# Altium PCB PCB_Rev1.PcbDoc
Units mm, origin at the board's own origin, x right, y up, seen from the top; angles counter-clockwise.
Board outline 37.4 x 31.8 mm, 4 copper layers (Top Layer, Layer 1 (GND), Layer 2 (PWR), Bottom Layer), stack 1.554 mm thick; 62 components, 43 nets, 242 pads, 70 vias.
Unrouted connection lines stored in the file: 48.
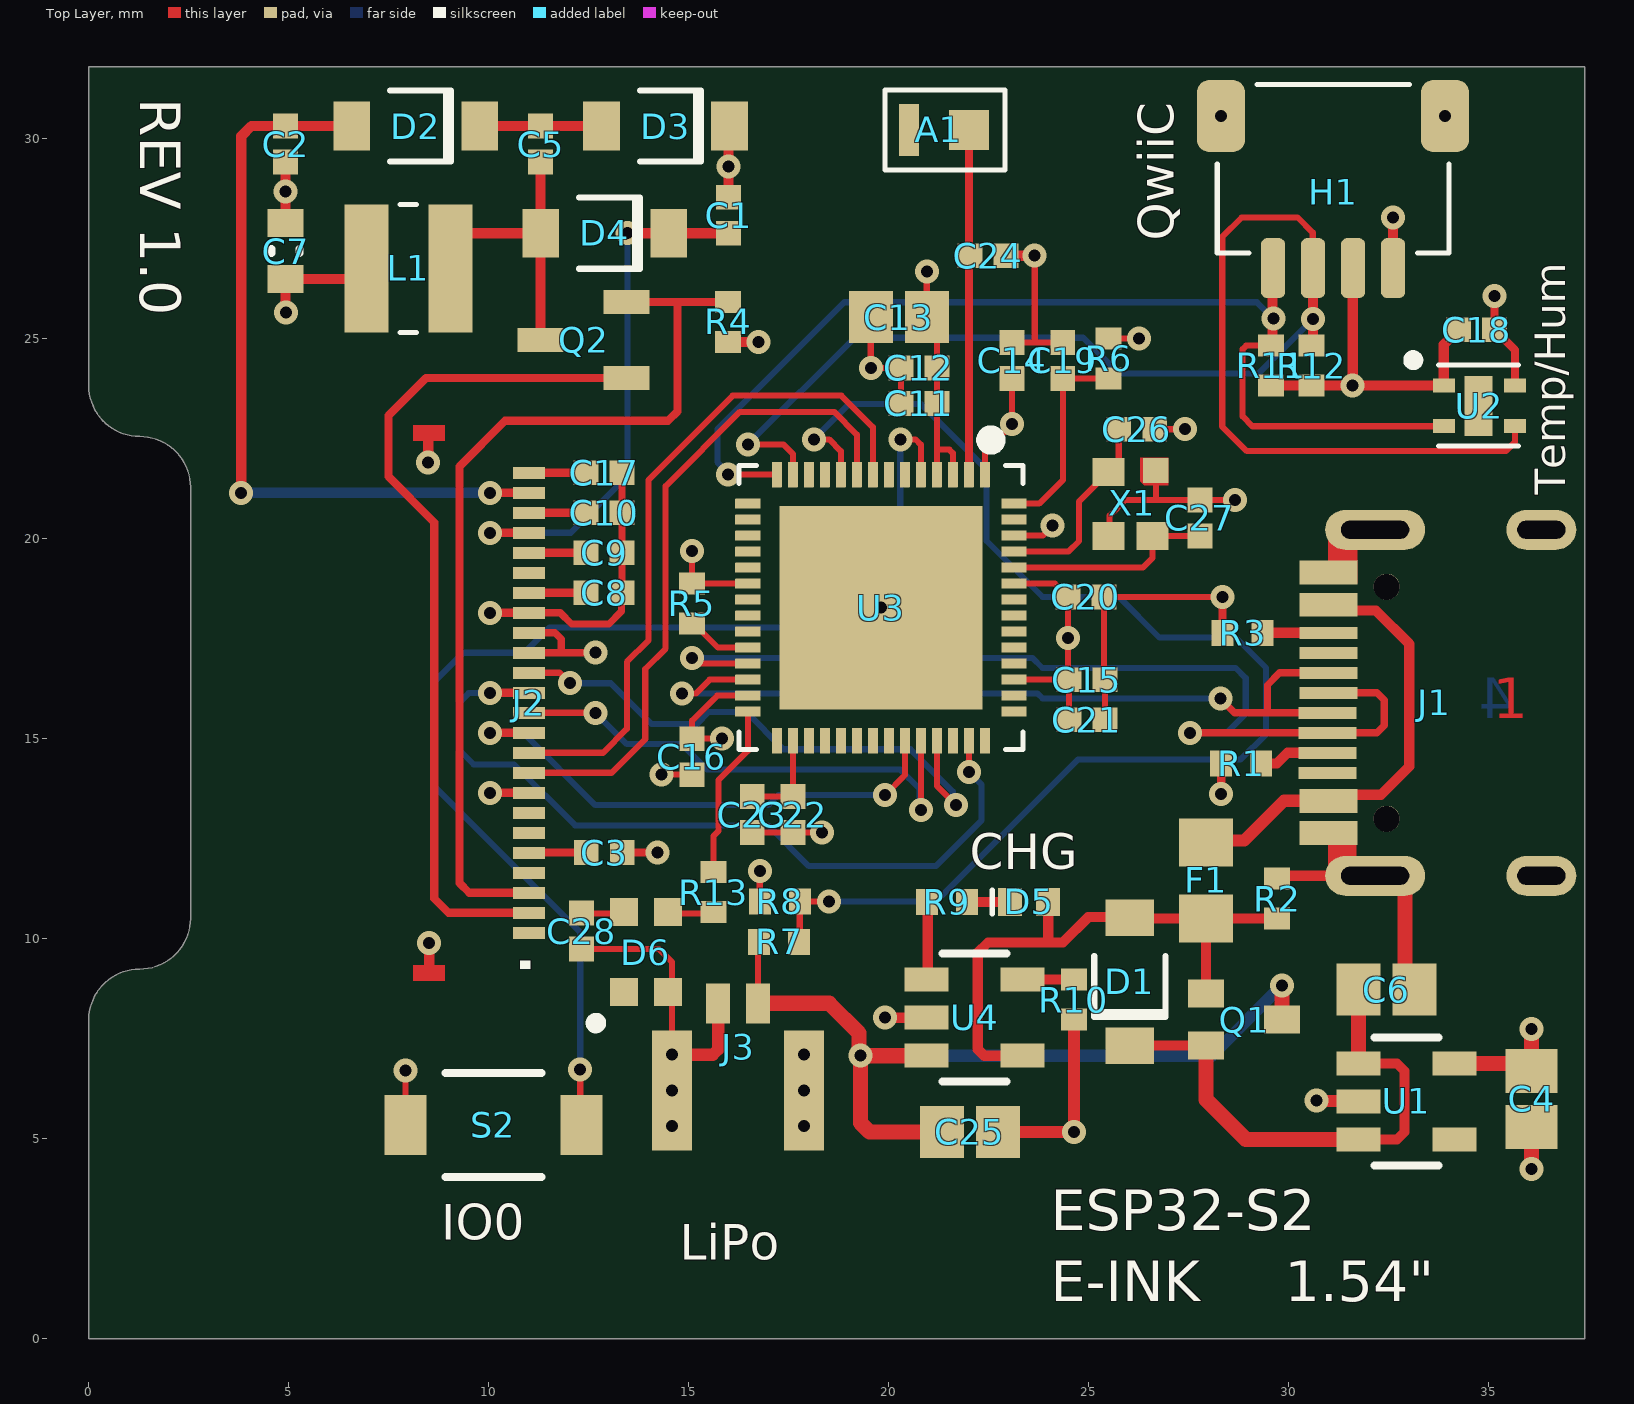
[diagram p0: Top Layer view]
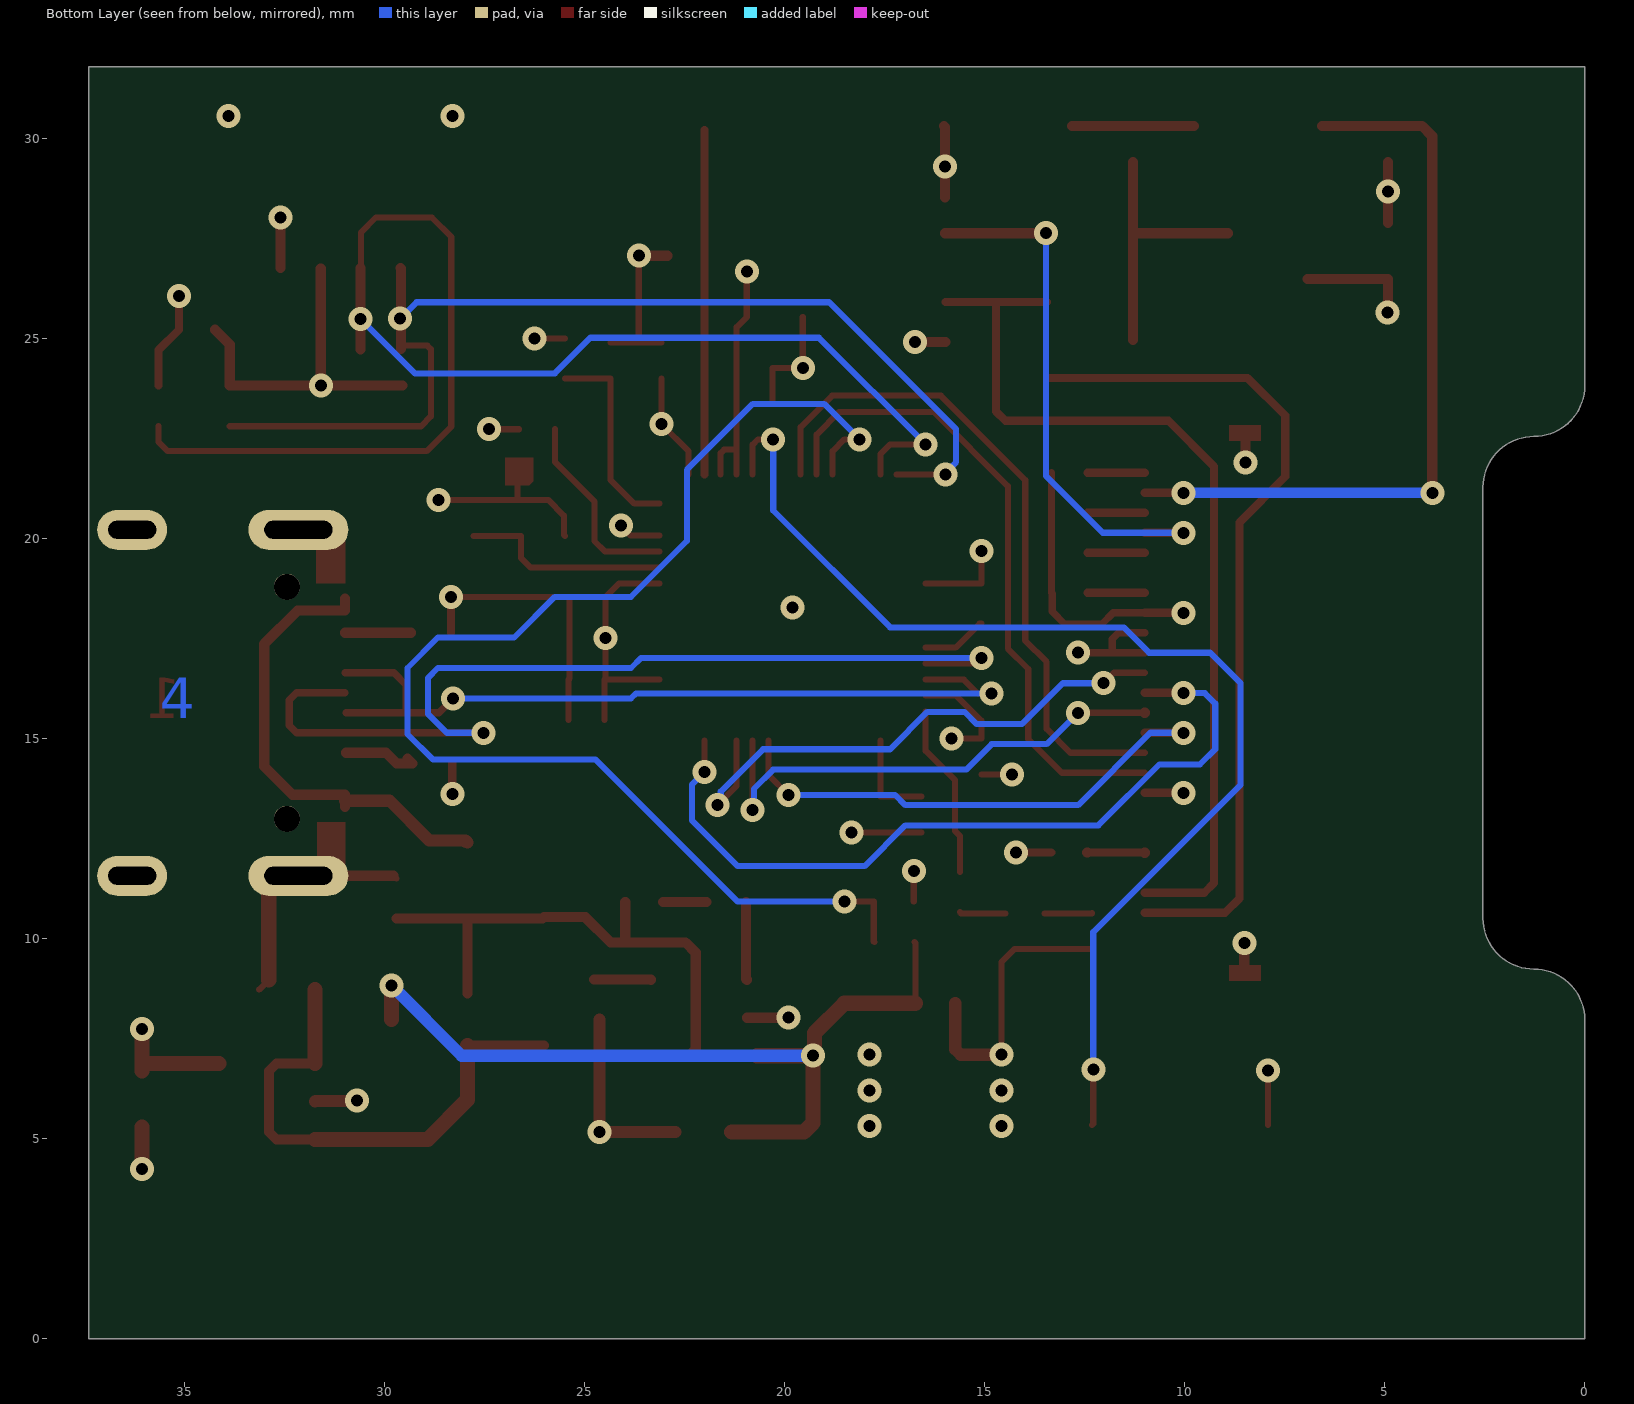
[diagram p1: Bottom Layer view, seen from below]
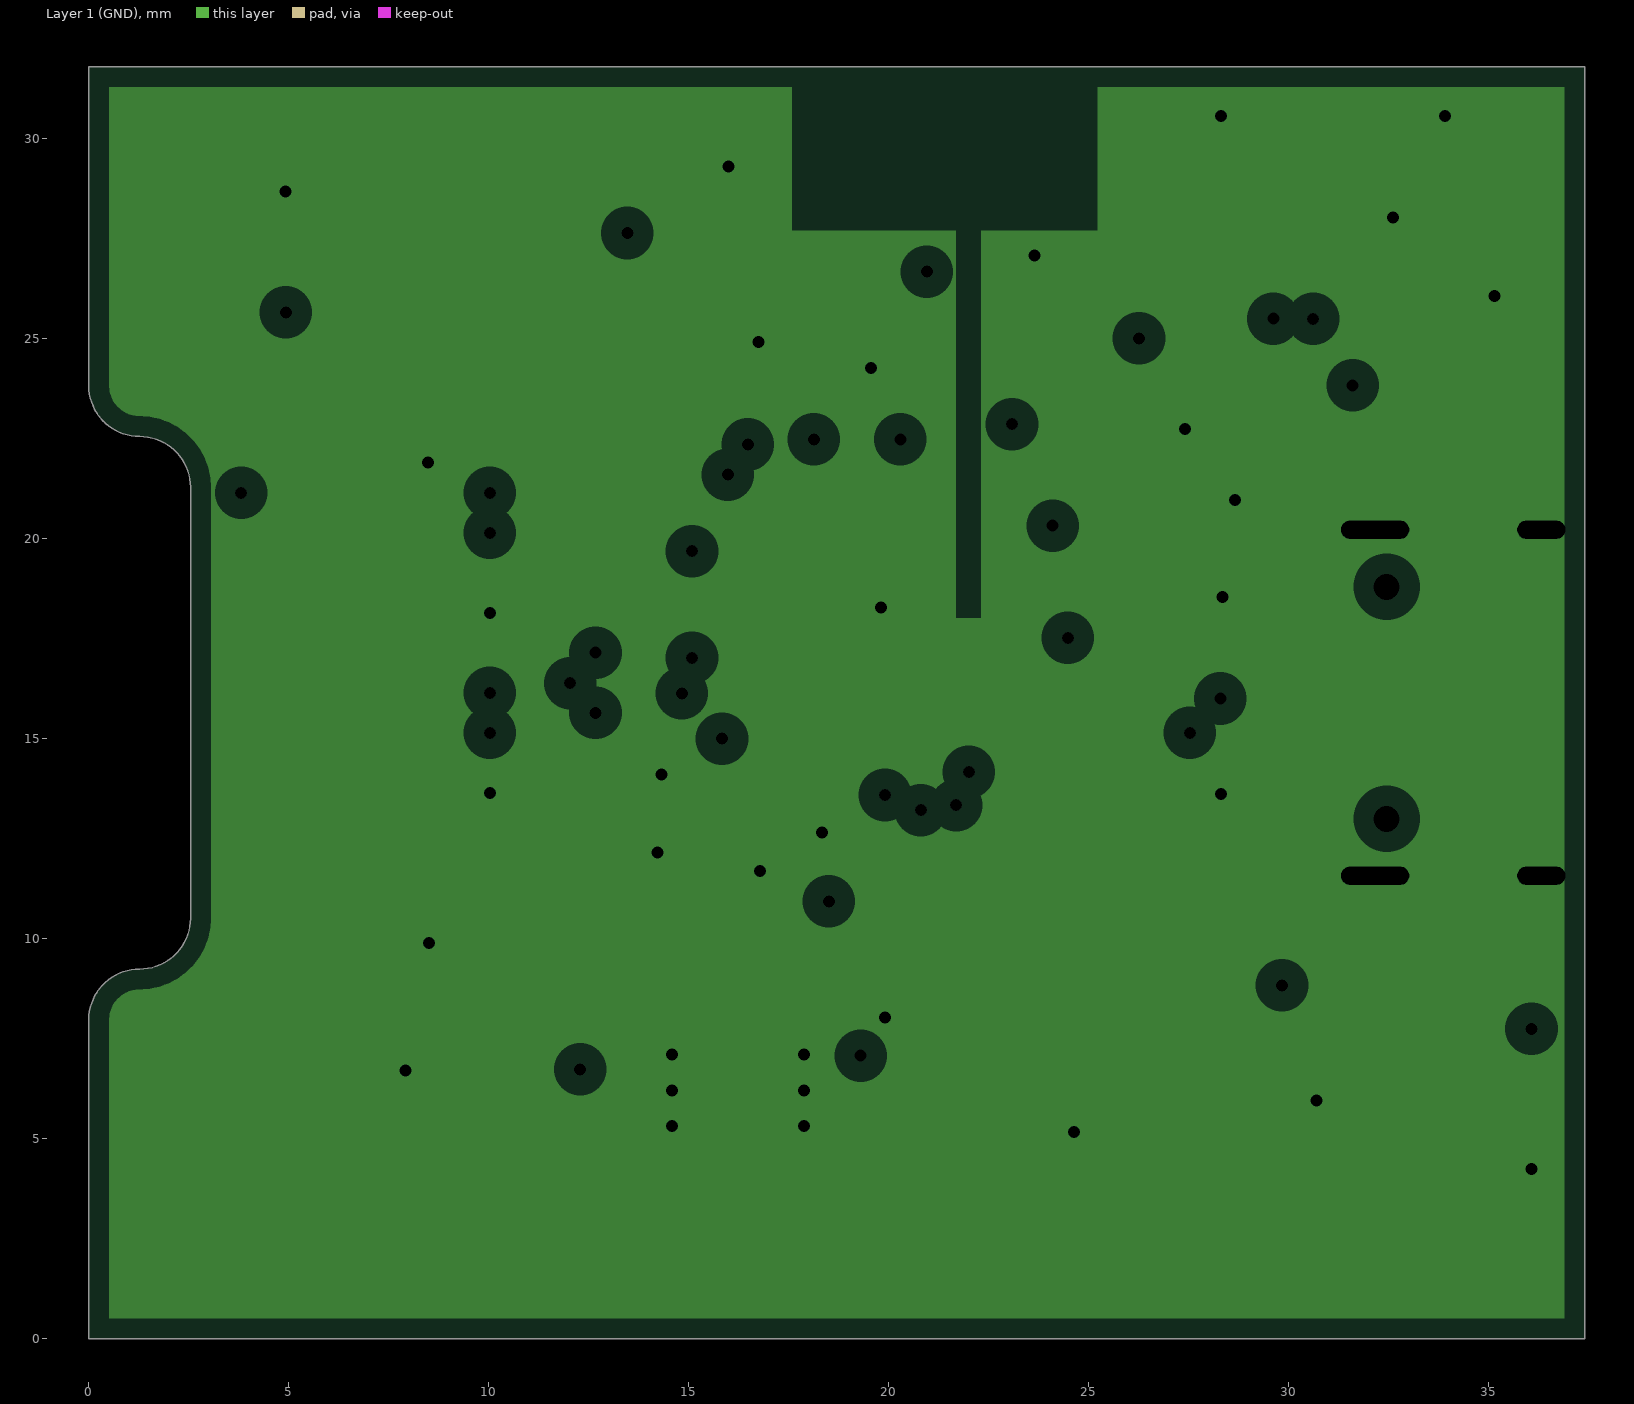
[diagram p2: Layer 1 (GND), clearances drawn from the general rule]
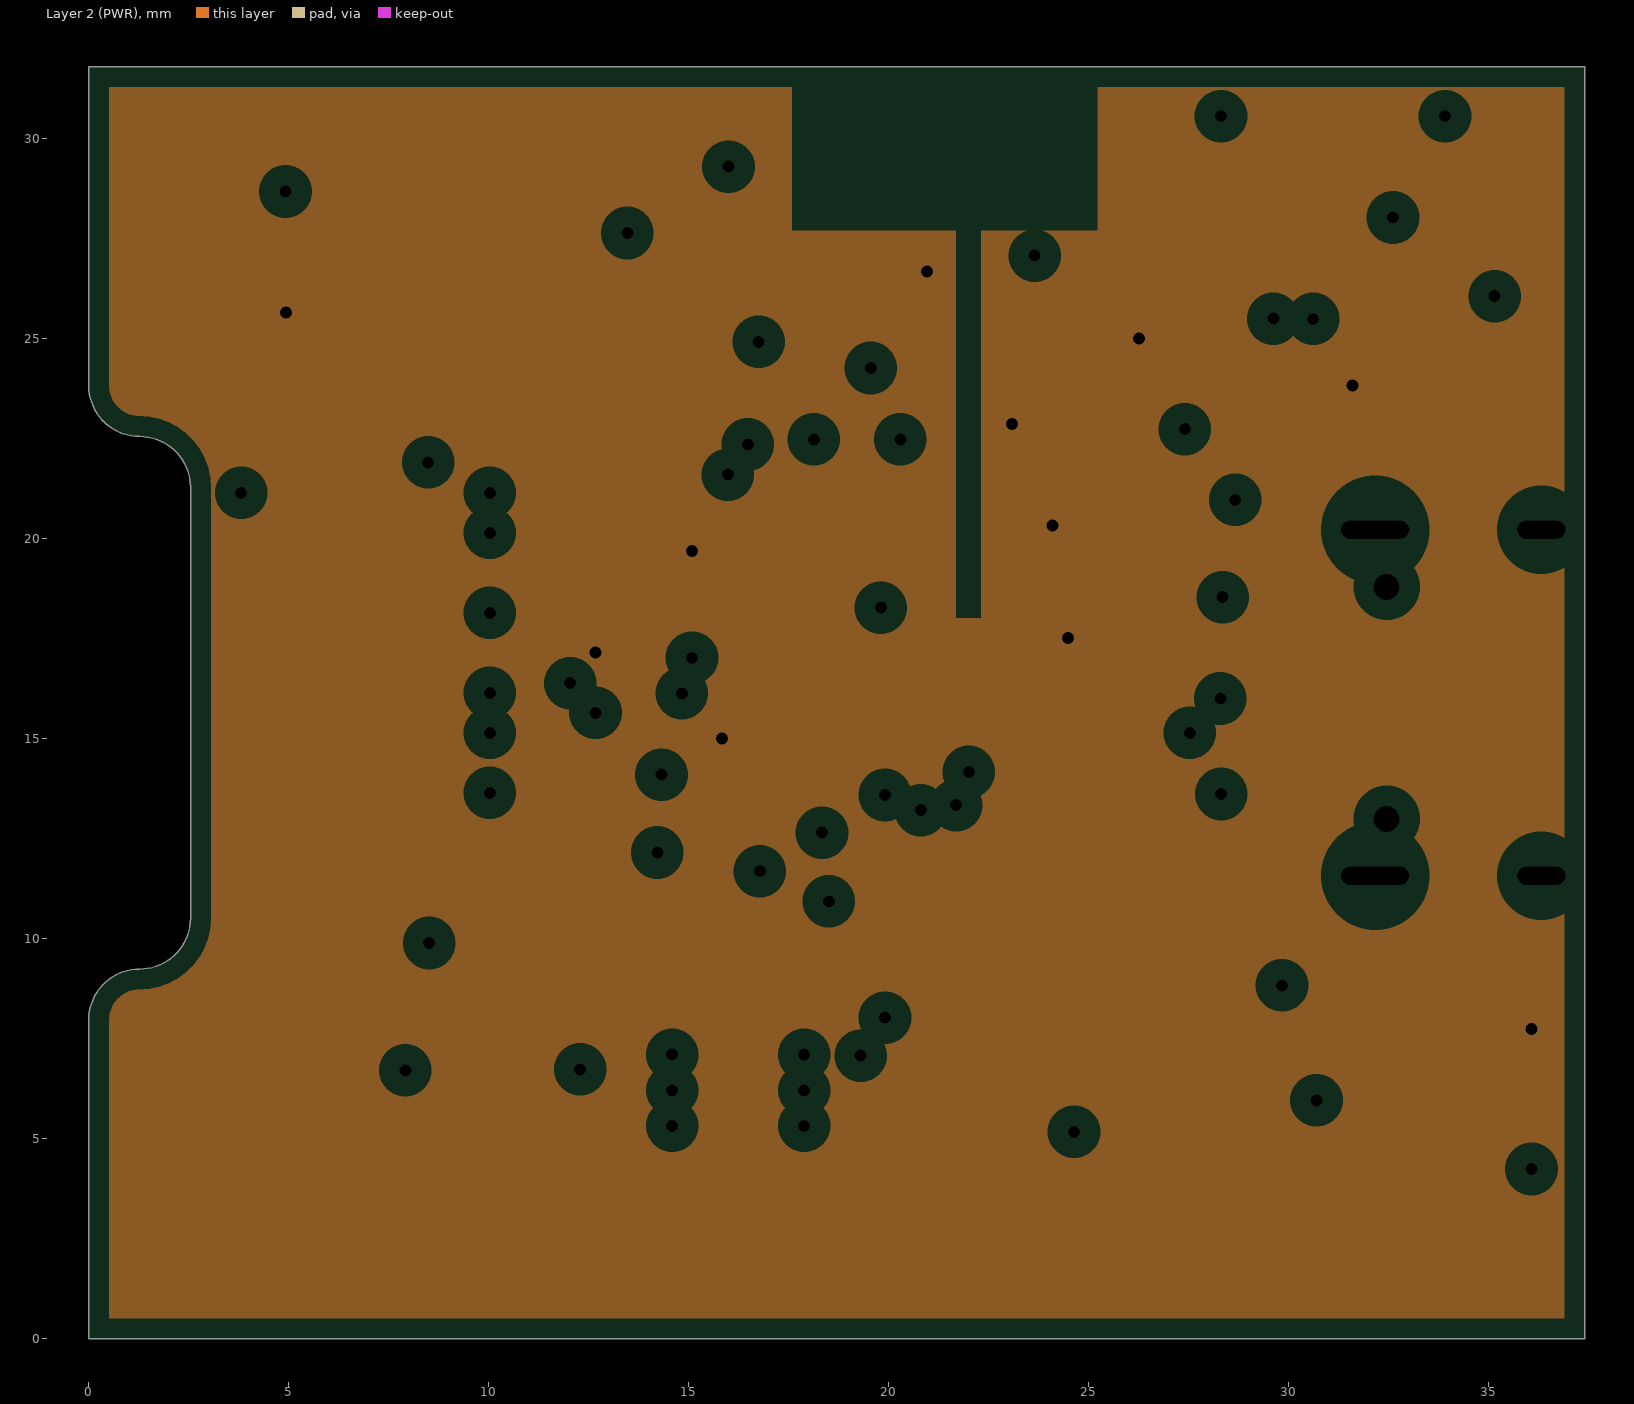
[diagram p3: Layer 2 (PWR), clearances drawn from the general rule]
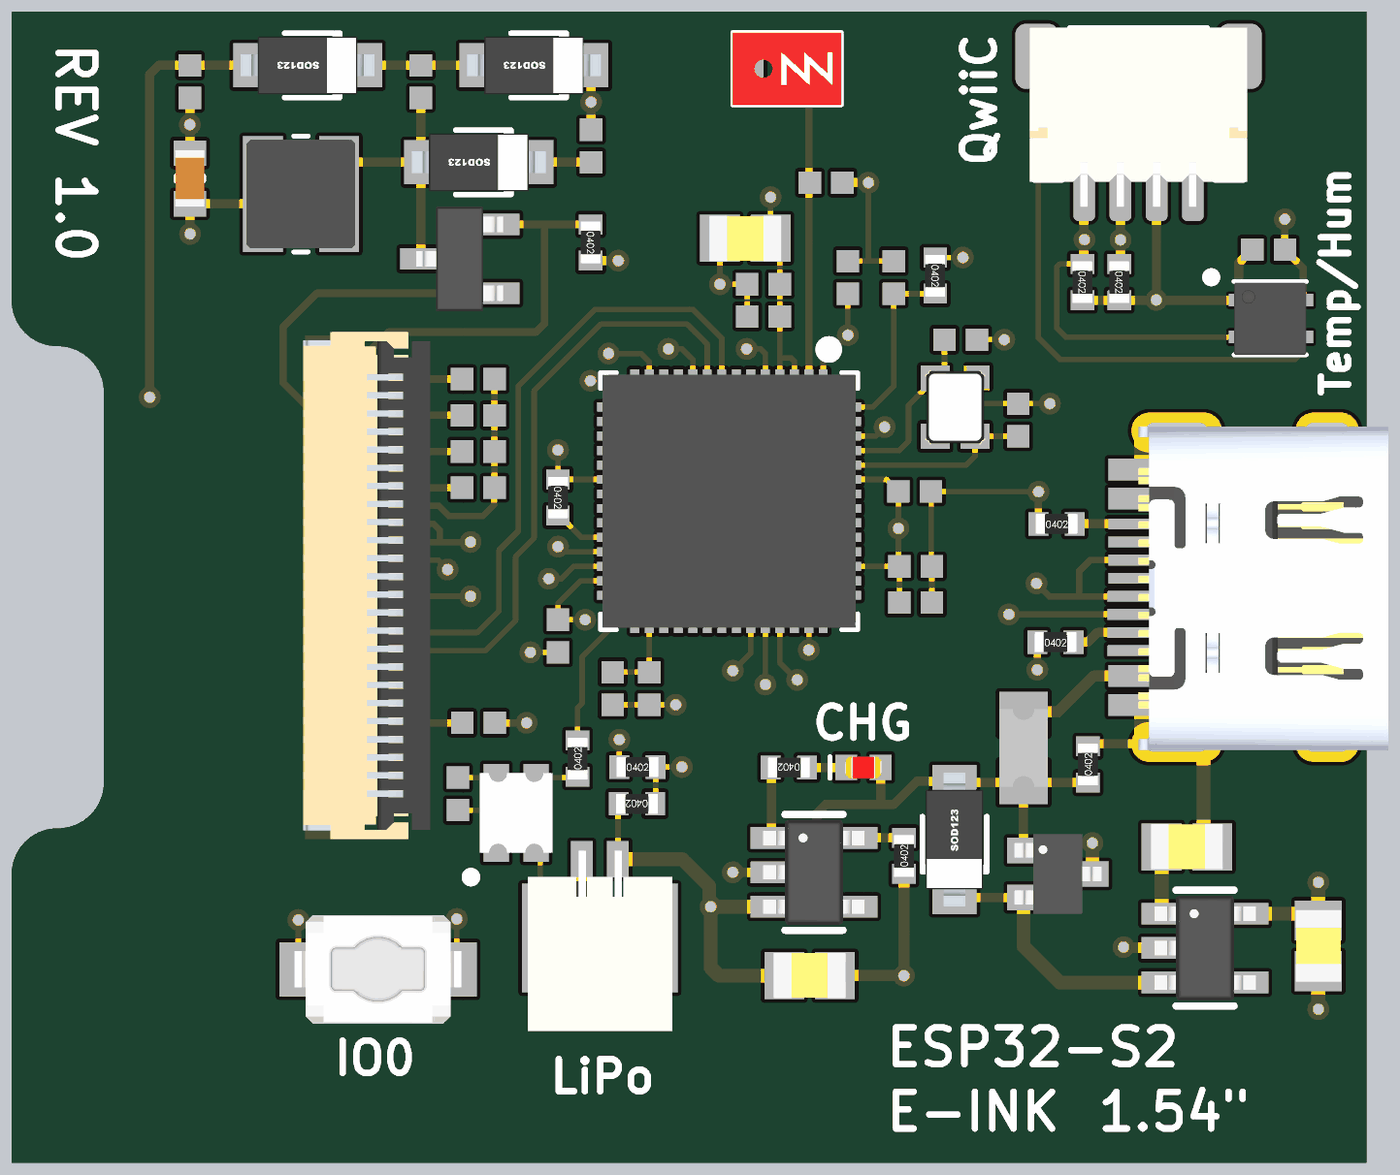
[diagram p4: 3D render of the assembled board from above, using the file's embedded part models]

## Layer stack, top to bottom
Top Solder: solder mask 0.0102, Solder Resist, Dk 3.5
Top Layer: signal copper 0.0356
Dielectric 2: prepreg 0.0711, PP-006, Dk 4.1
Layer 1 (GND): plane copper 0.0305, net GND
Dielectric 1: dielectric 1.2802, FR-4, Dk 4.8
Layer 2 (PWR): plane copper 0.0305, net +3.3V
Dielectric 3: prepreg 0.0711, PP-006, Dk 4.1
Bottom Layer: signal copper 0.0356
Bottom Solder: solder mask 0.0102, Solder Resist, Dk 3.5

## Board outline
0,0 0,7.975 cw(c1.27,7.973) 1.273,9.243 ccw(c1.275,10.513) 2.545,10.511 2.545,21.289 ccw(c1.275,21.287) 1.273,22.557 cw(c1.27,23.827) 0,23.825 0,31.8 37.4,31.8 37.4,0

## Design rules (kind name [scope] priority, off if disabled: settings)
Clearance Clearance_U2 [All vs InComponent('U2')] p1: gap=0.152 ignorepadtopadclearanceinfootprint=FALSE
Clearance Clearance_U3 [All vs InComponent('U3')] p2: gap=0.14 ignorepadtopadclearanceinfootprint=FALSE
Clearance Clearance_J1 [All vs InComponent('J1')] p3: gap=0.127 ignorepadtopadclearanceinfootprint=FALSE
Clearance Clearance_J2 [All vs InComponent('J2')] p4: gap=0.127 ignorepadtopadclearanceinfootprint=FALSE
Clearance [All] p5: gap=0.246 ignorepadtopadclearanceinfootprint=FALSE
MinimumSolderMaskSliver [All] p1: minsoldermaskwidth=0.046
PlaneClearance [All] p1: clearance=0.508
PlaneConnect PlaneConnect_Via [(IsVia)] p1: planeconnectstyle=Direct reliefexpansion=0.508 reliefentries=4 reliefconductorwidth=0.254 reliefairgap=0.254
PlaneConnect [All] p2: planeconnectstyle=Relief reliefexpansion=0.508 reliefentries=4 reliefconductorwidth=0.254 reliefairgap=0.254
PolygonConnect [All] p1: connectstyle=Relief reliefconductorwidth=0.254 reliefentries=4 polygonreliefangle="90 Angle" airgapwidth=0.254
RoutingVias [All] p1: holewidth=0.711 width=1.27 viastyle="Through Hole" minholewidth=0.711 minwidth=1.27 maxholewidth=0.711 maxwidth=1.27
SilkToSilkClearance [All] p1: silktosilkclearance=0.051
SilkToSolderMaskClearance [IsPad] p1: minsilkscreentomaskgap=0.051 clearancetoexposedcopper=TRUE
SolderMaskExpansion [All] p1: expansion=0.102 istentingtop=FALSE
Width [All] p1: maxlimit=0.635 minlimit=0.152 preferedwidth=0.152
25 further rules are at their usual default settings.

## Components (designator, comment, footprint, x,y, rotation, side; value= is the part's Value field where it differs from the comment)
A1 "NN02-101" NN02-101 21.255,30.223 r180 top value="Chip Antenna"
C1 "1uF" CAPC1005X56N 15.994,28.089 r90 top
C2 "1uF" CAPC1005X56N 4.92,29.867 r90 top
C3 "1uF" CAPC1005X56N 12.888,12.156 r180 top
C4 "10uF" CAPC2012X140N 36.07,5.995 r270 top
C5 "1uF" CAPC1005X56N 11.295,29.867 r270 top
C6 "10uF" CAPC2012X140N 32.442,8.727 r0 top
C7 "2.2uF" CAPC1608X09L 4.92,27.193 r90 top
C8 "1uF" CAPC1005X56N 12.882,18.65 r180 top
C9 "1uF" CAPC1005X56N 12.882,19.65 r180 top
C10 "1uF" CAPC1005X56N 12.882,20.65 r180 top
C11 "0.1uF" CAPC1005X56N 20.754,23.382 r180 top
C12 "1uF" CAPC1005X56N 20.754,24.271 r180 top
C13 "10uF" CAPC2012X140N 20.25,25.541 r180 top
C14 "0.1uF" CAPC1005X56N 23.082,24.458 r90 top
C15 "0.1uF" CAPC1005X56N 24.953,16.477 r0 top
C16 "0.1uF" CAPC1005X56N 15.081,14.552 r270 top
C17 "1uF" CAPC1005X56N 12.882,21.65 r180 top
C18 "0.1uF" CAPC1005X56N 34.696,25.226 r0 top
C19 "0.1uF" CAPC1005X56N 24.352,24.458 r90 top
C20 "0.1uF" CAPC1005X56N 24.929,18.547 r0 top
C21 "1uF" CAPC1005X56N 24.954,15.474 r0 top
C22 "0.1uF" CAPC1005X56N 17.604,13.104 r270 top
C23 "1uF" CAPC1005X56N 16.588,13.104 r270 top
C24 "1pF" CAPC1005X56N 22.483,27.076 r0 top
C25 "10uF" CAPC2012X140N 22.028,5.171 r0 top
C26 "10pF" CAPC1005X56N 26.199,22.738 r0 top
C27 "10pF" CAPC1005X56N 27.781,20.521 r90 top
C28 "0.1uF" CAPC1005X56N 12.319,10.193 r270 top
D1 "MBR0520" SOD123 26.027,8.93 r90 top
D2 "MBR0520-TP" SOD123 8.171,30.317 r180 top value=MBR0520
D3 "MBR0520-TP" SOD123 14.419,30.317 r180 top value=MBR0520
D4 "MBR0520-TP" SOD123 12.895,27.639 r180 top value=MBR0520
D5 "Red Led" LED1005X40N-Red 23.512,10.922 r0 top
D6 "RGB" WS2812B-2020 13.928,9.668 r270 top value=NeoPixel
F1 "TLC-PSMD050" PTC2012X70L 27.932,11.46 r90 top
H1 "QWiiC" SM04B-SRSS-TB 31.107,28.666 r180 top locked
J1 "USB-C" TYPE-C-31-M-12 36.114,20.225 r90 top locked
J2 "24POS Flex Connector" 687124182122 11,15.9 r90 top
J3 "CON2" JST_Micro_2PIN 16.236,8.387 r0 top
L1 "68uH" "INDUCTOR, 3mmX3mm" 7.988,26.761 r180 top
Q1 "LP1480WT1G" SC-70 28.882,7.98 r0 top
Q2 "" SOT95P240X110-3N 12.37,24.972 r180 top
R1 "5.1K" "RESC1005X40L (0402 FOOTPRINT)" 28.812,14.381 r0 top
R2 "100K" "RESC1005X40L (0402 FOOTPRINT)" 29.71,11.005 r90 top
R3 "5.1K" "RESC1005X40L (0402 FOOTPRINT)" 28.846,17.65 r0 top
R4 "2.2R" "RESC1005X40L (0402 FOOTPRINT)" 15.985,25.422 r270 top
R5 "10K" "RESC1005X40L (0402 FOOTPRINT)" 15.081,18.377 r270 top
R6 "10K" "RESC1005X40L (0402 FOOTPRINT)" 25.495,24.508 r270 top
R7 "100K" "RESC1005X40L (0402 FOOTPRINT)" 17.259,9.92 r180 top
R8 "100K" "RESC1005X40L (0402 FOOTPRINT)" 17.275,10.936 r0 top
R9 "4.7K" "RESC1005X40L (0402 FOOTPRINT)" 21.455,10.922 r180 top
R10 "4K" "RESC1005X40L (0402 FOOTPRINT)" 24.63,8.481 r90 top
R11 "10K" "RESC1005X40L (0402 FOOTPRINT)" 29.558,24.329 r270 top
R12 "10K" "RESC1005X40L (0402 FOOTPRINT)" 30.574,24.329 r270 top
R13 "100R" "RESC1005X40L (0402 FOOTPRINT)" 15.621,11.168 r90 top
S2 "=Value" TS-1088R-02526 10.114,5.348 r180 top
U1 "HT7833" SOT95P280X144-5N 32.942,5.933 r0 top
U2 "SHTC3" "DFN-4 (2.0mm X 2.0mm)" 34.765,23.321 r0 top value=Temp/Humid
U3 "ESP32-S2" "QFN56_0.4mm pitch" 19.804,18.277 r270 top locked
U4 "MCP73831T-2ACI/OT" SOT95P280X144-5N 22.147,8.026 r0 top value=MCP73831T-2ACI
X1 "40 Mhz" OSC20X16 26.086,20.889 r270 top

## Footprints (in the part's own frame and the unit in brackets; to place one, negate y for a bottom-side part, rotate by r counter-clockwise, add the part's x,y. Pads: shape width x height; smd on the part's side, far side on the other; paste and mask are expansions set on the pad)
687124182122 [mm] "CONN FFC TOP/BOT 24POS 0.50MM R/A"
  rect 0.3x0.8 smd: 1(-5.75,0) 2(-5.25,0) 3(-4.75,0) 4(-4.25,0) 5(-3.75,0) 6(-3.25,0) 7(-2.75,0) 8(-2.25,0) 9(-1.75,0) 10(-1.25,0) 11(-0.75,0) 12(-0.25,0) 13(0.25,0) 14(0.75,0) 15(1.25,0) 16(1.75,0) 17(2.25,0) 18(2.75,0) 19(3.25,0) 20(3.75,0) 21(4.25,0) 22(4.75,0) 23(5.25,0) 24(5.75,0)
  Top Layer region: 6.55,2.1 6.95,2.1 6.95,2.9 6.55,2.9
  Top Layer region: -6.95,2.1 -6.55,2.1 -6.55,2.9 -6.95,2.9
  body extent -6.95,-0.55 7.05,2.95, height 0.96
CAPC1005X56N [mm] "Chip Capacitor, 2-Leads, Body 1.0x0.5mm, IPC Medium Density (0402 ceramic)"
  rect 0.62x0.62 smd: 1(-0.45,0) 2(0.45,0)
  body extent -0.55,-0.3 0.55,0.3, height 0.6
CAPC1608X09L [mm] "Chip Capacitor, 2-Leads, Body 1.6x0.8mm, IPC High Density (0603 dense)"
  rect 0.7x0.9 smd: 1(-0.7,0) 2(0.7,0)
  silkscreen extent -0.05,-0.35 0.05,0.35, body extent -0.89,-0.48 0.88,0.48, height 1.03
CAPC2012X140N [mm] "Chip Capacitor, 2-Leads, Body 2.0x1.3mm, IPC Medium Density (0805 ceramic)"
  rect 1.1x1.3 smd: 1(-0.7,0) 2(0.7,0)
  body extent -1,-0.62 1,0.63, height 1.24
"DFN-4 (2.0mm X 2.0mm)" [mm] "DFN-4 (2.0mm X 2.0mm)"
  rect 0.55x0.35 smd mask+0.076: 1(-0.889,0.508) 2(-0.889,-0.508) 3(0.889,-0.508) 4(0.889,0.508)
  rect 0.7x1.5 smd paste-0.1 mask+0.076: 7(-0.025,0)
  silkscreen extent -1.78,-1 0.97,1.27, body extent -1.02,-1 0.98,1, height 0.75
"INDUCTOR, 3mmX3mm" [mm] "Inductor, 2-Leads, (3mmX3mm)"
  rect 1.1x3.2 smd: 1(-1.05,0) 2(1.05,0)
  silkscreen extent -0.2,-1.6 0.2,1.6, body extent -1.5,-1.5 1.5,1.5, height 1.5
JST_Micro_2PIN [mm]
  rect 0.6x1 smd: 1(0.5,0) 2(-0.5,0)
  rect 1x3 smd: ""(-1.65,-2.175) ""(1.65,-2.175)
  body extent -1.99,-4.74 2,0.24, height 2.9
LED1005X40N-Red [mm] "Chip LED 2-Leads, Body 1.0x0.5mm, (0402)"
  rect 0.6x0.7 smd: 1(-0.475,0) 2(0.475,0)
  silkscreen extent -0.92,-0.3 -0.92,0.3, body extent -0.5,-0.3 0.5,0.3, height 0.2
NN02-101 [mm] "COMPACT REACH XTEND - 101"
  rect 1x1 smd: 1(-0.75,0)
  rect 0.5x1.3 smd: 2(0.75,0)
  silkscreen extent -1.65,-1 1.35,1, body extent -1.65,-1 1.35,1, height 0.8
OSC20X16 [mm] "Crystal 2.0mm x 1.60mm 0.5mm height"
  rect 0.7x0.8 smd: 1(-0.783,-0.591) 2(0.817,-0.591) 3(0.817,0.509)
  rect 0.635x0.635 smd: 4(-0.817,0.591)
  Top Layer region: -1.138,0.196 -0.554,0.196 -0.453,0.298 -0.453,0.907 -1.138,0.907
  body extent -1.01,-0.87 1.04,0.78, height 0.4
PTC2012X70L [mm] "Chip Fuse, 2-Leads, Body 2.0x1.3mm, IPC Medium Density (0805)"
  rect 1.2x1.35 smd: 1(-0.95,0) 2(0.95,0)
  body extent -1.07,-0.67 1.08,0.68, height 0.66
"QFN56_0.4mm pitch" [mm] "QFN, 56-Leads, Body 7x7mm, Pitch 0.4mm, IPC Medium Density"
  rrect9% 0.635x0.25 smd: 1(-3.326,2.6) 2(-3.326,2.2) 3(-3.326,1.8) 4(-3.326,1.4) 5(-3.326,1) 6(-3.326,0.6) 7(-3.326,0.2) 8(-3.326,-0.2) 9(-3.326,-0.6) 10(-3.326,-1) 11(-3.326,-1.4) 12(-3.326,-1.8) 13(-3.326,-2.2) 14(-3.326,-2.6) 29(3.326,-2.6) 30(3.326,-2.2) 31(3.326,-1.8) 32(3.326,-1.4) 33(3.326,-1) 34(3.326,-0.6) 35(3.326,-0.2) 36(3.326,0.2) 37(3.326,0.6) 38(3.326,1) 39(3.326,1.4) 40(3.326,1.8) 41(3.326,2.2) 42(3.326,2.6)
  rrect9% 0.25x0.635 smd: 15(-2.6,-3.326) 16(-2.2,-3.326) 17(-1.8,-3.326) 18(-1.4,-3.326) 19(-1,-3.326) 20(-0.6,-3.326) 21(-0.2,-3.326) 22(0.2,-3.326) 23(0.6,-3.326) 24(1,-3.326) 25(1.4,-3.326) 26(1.8,-3.326) 27(2.2,-3.326) 28(2.6,-3.326) 43(2.6,3.326) 44(2.2,3.326) 45(1.8,3.326) 46(1.4,3.326) 47(1,3.326) 48(0.6,3.326) 49(0.2,3.326) 50(-0.2,3.326) 51(-0.6,3.326) 52(-1,3.326) 53(-1.4,3.326) 54(-1.8,3.326) 55(-2.2,3.326) 56(-2.6,3.326)
  rect 5.08x5.08 smd paste-4: 57(0,0)
  silkscreen extent -4.37,-3.55 3.55,3.55, body extent -3.5,-3.5 3.5,3.5, height 0.8
"RESC1005X40L (0402 FOOTPRINT)" [mm] "Chip Resistor, 2-Leads, Body 1.0x0.5mm, IPC Medium Density (0402)"
  rect 0.55x0.65 smd: 1(-0.5,0) 2(0.5,0)
  body extent -0.57,-0.27 0.58,0.28, height 0.41
SC-70 [mm] "SOT23, 3-Leads, Body 2x1.25mm, Pitch 0.65mm"
  rect 0.9x0.7 smd: 1(-0.95,0.65) 2(-0.95,-0.65) 3(0.95,0)
  body extent -1.2,-1.1 1.2,1.1, height 1
SM04B-SRSS-TB [mm] "CONN HEADER 4POS .100 R/A QWIIC"
  rrect50% 0.6x1.5 smd: 1(1.5,1.9) 2(0.5,1.9) 3(-0.5,1.9) 4(-1.5,1.9)
  rrect50% 1.2x1.8 smd: 5(-2.8,-1.9) 5(2.8,-1.9)
  silkscreen extent -2.9,-2.69 2.9,1.52, body extent -3,-2.69 3,2.26, height 3.25
SOD123 [mil] "Molded Diode, 2-Leads, Body 2.85x1.8mm, IPC Medium Density (SOD123)"
  rect 36x48 smd: 1(-63,0) 2(63,0)
  silkscreen extent -35,-35 25,35, body extent -73,-31 73,31, height 50
SOT95P240X110-3N [mm] "SOT23, 3-Leads, Body 3.0x2.5mm (max), Pitch 0.95mm, IPC Medium Density"
  rect 1.15x0.6 smd: 1(-1.075,0.95) 2(-1.075,-0.95) 3(1.075,0)
  body extent -1.2,-1.45 1.2,1.45, height 0.99
SOT95P280X144-5N [mm] "SOT23, 5-Leads, Body 3.1x3.0mm (max), Pitch 0.95mm, IPC Medium Density (RFMD SOT23-5)"
  rect 1.1x0.6 smd: 1(-1.2,0.95) 2(-1.2,0) 3(-1.2,-0.95) 4(1.2,-0.95) 5(1.2,0.95)
  silkscreen extent -0.8,-1.6 0.8,1.6, body extent -1.4,-1.45 1.4,1.45, height 1.45
TS-1088R-02526 [mm] "SWITCH TACTILE SPST-NO 0.05A 12V"
  rect 1.05x1.5 smd: 1(-2.2,0) 2(2.2,0)
  silkscreen extent -1.2,-1.3 1.2,1.3, body extent -2.3,-1.5 2.3,1.5, height 2
TYPE-C-31-M-12 [mm] "USB-C Connector"
  oval 1x1.75 hole 0.45 slot 1.2 at 90 deg: 1(-8.65,-0.2) 1(0,-0.2)
  oval 1x2.5 hole 0.45 slot 1.7 at 90 deg: 1(-8.65,3.955) 1(0,3.955)
  rect 0.3x1.45 smd: A1(-7.726,5.119) A4(-6.926,5.117) A5(-5.575,5.142) A6(-4.575,5.142) A7(-4.075,5.117) A8(-3.075,5.117) A9(-1.727,5.117) A12(-0.924,5.117) B1(-1.224,5.117) B4(-2.021,5.117) B5(-2.575,5.117) B6(-3.575,5.117) B7(-5.075,5.142) B8(-6.075,5.142) B9(-6.626,5.117) B12(-7.426,5.119)
  round 0.65 hole 0.65 unplated: ""(-7.225,3.667) ""(-1.425,3.667)
  body extent -8.82,-1.89 0.12,5.01, height 3.31
WS2812B-2020 [mm] "NeoPixel 2.0mm x 2.0mm"
  rect 0.7x0.7 smd: 1(1,-0.55) 2(1,0.55) 3(-1,0.55) 4(-1,-0.55)
  silkscreen extent 1.65,-1.38 1.9,-1.12, body extent -1.1,-1 1.1,1, height 0.84

## Part data
A1: "Antenna Chip 2.4Gig", Manufacturer=Ignion, Part_Number=NN02-101, Vendor=Digi-Key
C1 C2 C3 C5 C8 C9 C10 C12 C17 C21: library part CAP_0402, "CAP 1uF 0402", Part_Footprint=0402
  C12 C21: Vendor=LCSC
C4 C6 C13 C25: library part CAP_0805, "CAP 10uF 0805"
  C4 C6 C25: Part_Footprint=0805
C7: library part CAP_0402, "CAP 2.2uF 0603", Part_Footprint=0603
C11 C14 C15 C16 C18 C20 C22 C23 C28: library part CAP_0402, "CAP 0.1uF 0402", Part_Footprint=0402
  C11 C14 C15 C16 C20 C22 C23 C28: Vendor=LCSC
C19: library part CAP_0402, "CAP 0.1uF 0402", LCSC_Part_Number=C344190, Manufacturer=CCTC, Man_Part_Number=TCC0402X5R104M160AT, Vendor=LCSC
C24: library part CAP_0402, "CAP 1pF 0402", Part_Footprint=0402
C26 C27: library part CAP_0402, "CAP 10pF 0402", Part_Footprint=0402, Vendor=LCSC
D1: library part MBR0520-TP, "DIODE SCHOTTKY 20V 500MA SOD-123", Manufacturer=Micro, Part_Footprint=SOD-123, Part_Number=C78746, Vendor=LCSC
D2 D3 D4: "DIODE SCHOTTKY 20V 500MA SOD-123", Manufacturer=Micro, Part_Footprint=SOD-123, Part_Number=C78746, Vendor=LCSC
D5: library part LED_0402_SMALL_Red, "LED Red 0402", Manufacturer=Lite-On, Part_Footprint=0402, Part_Number=C364556, Vendor=LCSC
D6: library part WS2812B-2020, "LED,RGB,NEOPIXEL,WS2818B 2020", Manufacturer=Worldsemi, Part_Footprint=SMD-5050, Part_Number=C139127, Vendor=LCSC
F1: library part PTC_FUSE, "PTC FUSE 500mA hold, 1A trip", Manufacturer=TLC, Part_Number=C261942, Vendor=LCSC
H1: library part SM04B-SRSS-TB, "CONN HEADER 4POS .100 R/A QWIIC", Manufacturer=JST, Part_Number=PRT-14417, Vendor=Digi-Key
J1: "CONN RECPT USB-C", Manufacturer=KHE, Part_Footprint=SMT, Part_Number=C165948, Vendor=LCSC
J2: library part 687124182122, "CONN FFC TOP/BOT 24POS 0.50MM R/A", Manufacturer=Wurth, Part_Number=687124182122, Vendor=Digi-Key
J3: library part JST_Micro_CONN_2PIN, "JST MIcro CONN 2POS"
L1: "INDUCTOR 68uH 20% 4mmx4mm", Manufacturer=SXN, Part_Footprint=4mmx4mm, Part_Number=C135265, Vendor=LCSC
Q1: "MOSFET P-CH 20V 1.4A SC-70", Manufacturer=LRC, Part_Footprint=SC-70, Part_Number=C172434, Vendor=LCSC
Q2: library part 2N7002K-T1-E3, "MOSFET N-CH 60V 300MA SOT-23", Manufacturer="Vishay Siliconix", Part_Footprint=SOT-23, Part_Number=2N7002K-T1-E3, Vendor=LCSC
R1 R3: library part RES_0402, "RES 5.1K 0402", Part_Footprint=0402
R2 R7 R8: library part RES_0402, "RES 100K 0402", Part_Footprint=0402
R4: library part RES_0402, "RES 2.2R 0402", Part_Footprint=0402
R5 R6: library part RES_0402, "RES 10K 0402", LCSC_Part_Number=C258091, Manufacturer=Guangdong, Man_Part_Number=RC-02W1002FT, Vendor=LCSC
R9: library part RES_0402, "RES 4.7K 0402", Part_Footprint=0402
R10: library part RES_0402, "RES 4K 0402", Part_Footprint=0402
R11 R12: library part RES_0402, "RES 10K 0402", Part_Footprint=0402
R13: library part RES_0603, "RES 100R 0402", Manufacturer=Yageo, PartNumber=C106232, Man_Part_Number=RC0402FR-07100RL, Vendor=LCSC
S2: library part TS-1088R-02526, "Tactile Micro Switch", Manufacturer=XUNPU, Part_Footprint=SMD, Part_Number=C455281, Vendor=LCSC
U1: "IC LDO 3.3V 0.5A SOT23-5", Manufacturer=Holtek, Part_Footprint=SOT23-5, Part_Number=C164106, Vendor=LCSC
U2: "Humidity/Temperature Sensor", Manufacturer=Sensirion, Part_Number=SHTC3, Vendor=LCSC
U3: "WIFI/Bluetooth, QFN-56 7x7", Manufacturer=Espressif, Part_Footprint=QFN56, Part_Number=C529594, Vendor=LCSC
U4: "Charger IC Lithium-Ion/Polymer SOT23-5", Manufacturer=Microchip, Part_Number=MCP73831T-2ACI/OT, Vendor=Digi-Key
X1: library part 40Mhz, "CRYSTAL 40MHZ 10PF SMD", Manufacturer=ECS, Part_Number=ECS-400-10-37B2-CKM, Vendor=Digi-Key

## Via types
v1: diameter 0.6, hole 0.3, Top Layer to Bottom Layer, tented both sides, 70 vias

## Nets (pads, with @x,y where several pads share a name; then routed paths per layer and width w, separated by ;. In a path a pad name is that pad's centre, name@x,y a point inside that pad or via, vN(x,y) a via of type N, cw(c..) or ccw(c..) an arc to the next point about the centre after c; other vN are vias at no path point)
+3.3V: C4.1 C7.1 C11.1 C12.1 C13.1 C14.1 C15.1 C16.1 C18.1 C20.1 C21.1 H1.3 J2.15 J2.16 L1.2 R5.1 R6.1 R11.2 R12.2 U1.5 U2.1 U3.1 U3.3 U3.4 U3.20 U3.27 U3.45 U3.51 U3.54 | length 39.3
  Top Layer w0.152: v1(15.081,19.69) R5.1 U3.20 ; v1(15.832,15.002) C16.1 15.084,15.006 15.084,15.452 15.71,16.077 U3.27 ; v1(20.95,26.675) C13.1 21.204,25.287 C12.1 C11.1 21.204,22.23 ; U3.4 21.204,22.23 ; U3.3 21.604,22.141 21.515,22.23 21.204,22.23 ; U3.1 22.404,22.188 v1(23.082,22.865) C14.1 ; U3.45 C15.1 ; U3.51 24.149,18.877 C20.1 v1(24.479,17.525) 24.479,16.502 C15.1 ; U3.54 23.85,20.077 v1(24.098,20.325) ; C21.1 24.503,15.475 C15.1 ; R6.1 v1(26.257,25.008) ; v1(31.596,23.835) v1@31.602,23.841 ; H1.3@31.602,26.761 H1.3
  Top Layer w0.178: J2.15 11.813,17.15 ; J2.16 11.653,17.65 11.813,17.49 11.813,17.15 ; v1(12.668,17.15) 11.813,17.15
  Top Layer w0.254: v1@4.92,25.653 C7.1 L1.2@6.935,26.493 ; R11.2 R12.2 v1@31.59,23.829 ; v1(31.596,23.835) v1@31.59,23.829 ; v1@31.602,23.841 H1.3@31.602,26.761 ; C18.1 33.876,24.856 U2.1 v1@31.59,23.829 ; C4.1@35.882,6.883 C4.1
  Top Layer w0.381: U1.5 C4.1@35.882,6.883 ; C4.1 v1(36.07,7.747)
  other v1: 4.926,25.66
+3.3V_VDD_SPI: C22.1 C23.1 U3.30 | length 2.4
  Top Layer w0.152: C23.1 C22.1 U3.30
BAT_V: R7.1 R8.2 U3.10 | length 32.9
  Top Layer w0.152: R7.1 17.775,9.936 R8.2 v1(18.502,10.936) ; v1(18.129,22.484) 18.51,22.484 18.804,22.19 U3.10
  Bottom Layer w0.152: v1(18.129,22.484) 19.018,23.373 20.796,23.373 22.447,21.722 22.447,19.944 23.844,18.547 25.749,18.547 26.765,17.531 28.67,17.531 29.432,16.769 29.432,15.118 28.797,14.483 24.733,14.483 21.185,10.936 v1(18.502,10.936)
D+: J1.A6 J1.B6 U3.26 | length 20.6
  Top Layer w0.152: v1@14.87,16.178 v1(14.827,16.134) 15.182,16.134 15.525,16.477 U3.26
  Top Layer w0.178: v1(28.289,16.007) 28.646,15.65 29.466,15.65 ; J1.A6 29.466,15.65 ; J1.B6 29.769,16.65 29.466,16.347 29.466,15.65
  Bottom Layer w0.152: v1(14.827,16.134) 23.717,16.134 23.844,16.007 v1(28.289,16.007)
D-: J1.A7 J1.B7 U3.25 | length 25
  Top Layer w0.152: v1(15.081,17.023) 15.227,16.877 U3.25
  Top Layer w0.178: v1(27.527,15.15) J1.B7 32.206,15.15 32.387,15.331 32.387,15.966 32.203,16.15 J1.A7
  Bottom Layer w0.152: v1(15.081,17.023) 23.59,17.023 23.844,16.769 28.67,16.769 28.924,16.515 28.924,15.626 28.447,15.15 v1(27.527,15.15)
E-INK_BSY: J2.9 U3.9 | length 16.6
  Top Layer w0.152: J2.9 13.071,14.15 13.912,14.991 13.912,16.744 14.42,17.252 14.42,21.316 16.275,23.17 18.637,23.17 19.204,22.603 U3.9
E-INK_CS: J2.12 U3.38 | length 12.8
  Top Layer w0.152: J2.12 v1(12.668,15.65) ; v1(20.804,13.213) U3.38
  Bottom Layer w0.152: v1(12.668,15.65) 13.453,14.864 14.827,14.864 15.462,14.229 20.288,14.229 20.769,13.748 20.769,13.248 v1(20.804,13.213)
E-INK_DC: J2.11 U3.37 | length 13.3
  Top Layer w0.152: v1(19.907,13.594) 20.404,14.092 U3.37
  Top Layer w0.203: v1(10.029,15.15) J2.11
  Bottom Layer w0.152: v1(10.029,15.15) 10.858,15.15 12.668,13.34 16.986,13.34 17.24,13.594 v1(19.907,13.594)
E-INK_RST: J2.10 U3.8 | length 17.1
  Top Layer w0.152: J2.10 12.86,14.65 13.455,15.245 13.455,16.922 13.989,17.455 13.989,21.468 16.097,23.577 18.815,23.577 19.604,22.787 U3.8
GDR: J2.2 Q2.1 | length 21.4
  Top Layer w0.203: J2.2 8.996,10.65 8.636,11.01 8.636,20.408 7.489,21.555 7.489,23.079 8.432,24.022 Q2.1
GND: C1.2 C2.1 C3.1 C4.2 C6.2 C7.2 C8.1 C9.1 C10.1 C11.2 C12.2 C13.2 C14.2 C15.2 C16.2 C17.1 C18.2 C19.2 C20.2 C21.2 C22.2 C23.2 C24.2 C25.2 C26.2 C27.2 C28.2 D3.1 D6.2 H1.4 H1.5 J1.1 J1.A1 J1.A12 J1.B1 J1.B12 J2.8 J2.17 J3. J3.2 R1.1 R2.2 R3.1 R4.2 R8.1 R10.1 S2.2 U1.2 U2.4 U3.57 U4.2 X1.2 X1.4 | length 63.8
  Top Layer w0.152: S2.2 v1(7.914,6.709) ; C28.2 14.26,9.743 14.586,9.417 v1(14.586,7.101) ; v1(14.319,14.102) C16.2 ; C23.2 C22.2 v1(18.332,12.654) ; R8.1 v1(16.775,11.689) ; v1@19.526,24.271 C12.2 C11.2 ; v1(19.55,24.271) C13.2 ; C14.2 23.717,24.908 ; v1(23.65,27.076) 23.65,24.976 23.717,24.908 ; C19.2 23.717,24.908 ; C21.2 25.403,15.475 C15.2 25.379,16.502 C20.2 25.387,18.539 v1(28.346,18.539) ; X1.2 25.52,20.097 25.52,20.579 25.912,20.971 C27.2 v1(28.659,20.971) ; C26.2 v1(27.4,22.738) ; 26.677,20.986 X1.4 ; R2.2 R2.2@29.78,11.575 ; J1.1@32.159,11.575 32.68,11.575 J1.1@32.903,11.352 ; C6.2@32.903,8.966 C6.2
  Top Layer w0.178: J2.17 11.788,18.15 12.067,17.871 13.007,17.871 13.314,18.177 13.314,18.632 C8.1 C9.1 C10.1 C17.1
  Top Layer w0.203: v1(10.029,13.65) J2.8 ; v1(10.029,18.15) J2.17 ; C3.1 v1(14.216,12.156) ; v1(28.312,13.619) R1.1 ; R3.1 v1(28.346,18.539) ; v1(35.146,26.065) C18.2 35.654,24.718 U2.4
  Top Layer w0.254: C7.2 C2.1 ; v1(8.486,21.91) 8.486,22.646 ; 8.511,9.159 v1(8.511,9.895) ; R4.2 v1(16.747,24.922) ; C1.2 15.994,30.292 D3.1 ; v1(19.907,8.026) U4.2 ; C24.2 v1(23.65,27.076) ; R2.2@29.78,11.575 J1.1@32.159,11.575 ; H1.4 v1(32.607,28.031)
  Top Layer w0.305: v1(14.586,7.101) 15.602,7.101 15.736,7.235 J3.2 ; C25.2 v1(24.63,5.171) R10.1 ; v1@30.706,5.946 31.729,5.946 U1.2
  Top Layer w0.381: C6.2@32.903,8.966 J1.1@32.903,11.352 ; v1(36.07,4.243) C4.2
  other v1: 14.586,5.323 17.886,5.323 30.693,5.958 14.586,6.212 17.886,6.212 17.886,7.101 19.804,18.277 4.92,28.68 15.994,29.301 28.307,30.566 33.907,30.566
GPIO0: S2.1 U3.5 | length 29.1
  Top Layer w0.152: v1(12.287,6.736) 12.287,5.375 S2.1 ; v1(20.288,22.484) 20.669,22.484 20.804,22.349 U3.5
  Bottom Layer w0.152: v1(12.287,6.736) 12.287,10.165 8.604,13.848 8.604,16.388 9.366,17.15 10.89,17.15 11.525,17.785 17.367,17.785 20.288,20.706 v1(20.288,22.484)
GPIO18: R5.2 U3.24 | length 1.6
  Top Layer w0.152: R5.2 15.131,17.877 15.731,17.277 U3.24
LiPO: C25.1 J3.1 Q1.3 R7.2 U4.3 | length 22.3
  Top Layer w0.152: J3.1 16.736,9.897 R7.2
  Top Layer w0.381: J3.1 18.51,8.387 19.254,7.643 19.254,7.118 v1(19.296,7.076) ; U4.3@20.693,7.076 v1(19.296,7.076) ; C25.1 19.519,5.171 19.296,5.394 v1(19.296,7.076) ; Q1.3 v1(29.832,8.835)
  Bottom Layer w0.305: v1(19.296,7.076) 28.073,7.076 v1(29.832,8.835)
MOSI: J2.14 U3.39 | length 14.3
  Top Layer w0.152: J2.14 11.771,16.65 v1(12.033,16.388) ; U3.39 21.204,13.821 v1(21.685,13.34)
  Bottom Layer w0.152: v1(12.033,16.388) 13.049,16.388 14.065,15.372 15.208,15.372 15.506,15.671 16.433,15.671 17.367,14.737 20.542,14.737 21.599,13.68 21.599,13.426 v1(21.685,13.34)
NEOPIXEL: R13.2 U3.28 | length 4.4
  Top Layer w0.152: R13.2 15.621,12.573 15.748,12.7 15.748,13.97 16.478,14.7 U3.28
NetA1_1: A1.1 C24.1 U3.2 | length 8.6
  Top Layer w0.203: U3.2@22.005,21.602 A1.1
NetC3_2: C3.2 J2.5 | length 1.4
  Top Layer w0.203: J2.5@11.003,12.153 C3.2@12.435,12.153
  Top Layer w0.254: J2.5 J2.5@11.003,12.153 ; C3.2@12.435,12.153 C3.2
NetC5_1: C5.1 D2.1 D3.2 | length 3
  Top Layer w0.254: D2.1 C5.1 D3.2
NetC5_2: C5.2 D4.2 L1.1 Q2.3 | length 6.8
  Top Layer w0.254: L1.1@8.922,27.639 D4.2 ; Q2.3 D4.2 ; C5.2 D4.2
NetC6_1: C6.1 D1.1 Q1.2 U1.1 U1.3 | length 13.3
  Top Layer w0.254: D1.1 Q1.2 ; U1.3 32.707,4.983 32.895,5.171 32.895,6.695 32.707,6.883 U1.1
  Top Layer w0.381: Q1.2 27.932,5.977 28.926,4.983 U1.3 ; U1.1 C6.1
NetC8_2: C8.2 J2.18 | length 1.4
  Top Layer w0.203: J2.18 C8.2
NetC9_2: C9.2 J2.20 | length 1.4
  Top Layer w0.203: J2.20 C9.2
NetC10_2: C10.2 J2.22 | length 1.4
  Top Layer w0.203: J2.22 C10.2
NetC17_2: C17.2 J2.24 | length 1.4
  Top Layer w0.203: J2.24 C17.2
NetC19_1: C19.1 R6.2 U3.56 | length 5.1
  Top Layer w0.152: U3.56 23.761,20.877 24.352,21.468 C19.1 R6.2
NetD5_1: D5.1 R9.1 | length 1.1
  Top Layer w0.254: R9.1 D5.1
NetD6_3: D6.3 R13.1 | length 1.2
  Top Layer w0.152: D6.3@14.478,10.636 15.589,10.636 R13.1
NetF1_2: F1.2 J1.A4 J1.A9 J1.B4 J1.B9 | length 11.9
  Top Layer w0.254: F1.2 F1.2@28.007,12.41 ; J1.A4 30.997,13.449 J1.B9 32.306,13.599 33.012,14.305 33.012,17.373 32.181,18.204 J1.B4 J1.A9
  Top Layer w0.305: F1.2 27.979,12.457 28.886,12.457 29.878,13.449 J1.B9@30.997,13.449
NetJ1_A5: J1.A5 R1.2 | length 1.9
  Top Layer w0.254: R1.2 R1.2@29.43,14.499 ; R1.2@29.32,14.381 29.701,14.381 29.97,14.65 J1.A5
NetJ1_B5: J1.B5 R3.2 | length 1.7
  Top Layer w0.254: R3.2 J1.B5
NetR9_2: R9.2 U4.1 | length 2
  Top Layer w0.254: U4.1 20.973,9.002 R9.2@20.973,10.922
NetR10_2: R10.2 U4.5 | length 1.4
  Top Layer w0.254: U4.5 23.35,8.979 24.628,8.979 R10.2 R10.2@24.767,8.981
RESE: J2.3 Q2.2 R4.1 | length 23.5
  Top Layer w0.203: J2.3 9.512,11.15 9.267,11.395 9.267,21.809 10.409,22.951 14.48,22.951 14.715,23.186 14.715,25.922 ; Q2.2 14.715,25.922 ; R4.1 14.715,25.922
SCL: H1.1 R11.1 U2.2 U3.14 | length 27.4
  Top Layer w0.152: v1(15.978,21.604) U3.14 ; R11.1 28.936,24.829 28.846,24.74 28.846,23.058 29.091,22.813 U2.2
  Top Layer w0.254: R11.1@29.595,24.741 29.595,26.754 H1.1
  Bottom Layer w0.152: v1(15.978,21.604) 15.978,21.654 15.716,21.917 15.716,22.738 18.891,25.913 29.203,25.913 v1(29.613,25.502)
SCLK: J2.13 U3.41 | length 19.9
  Top Layer w0.152: v1(22.004,14.168) U3.41
  Top Layer w0.203: v1(10.029,16.15) J2.13
  Bottom Layer w0.152: v1(10.029,16.15) 10.021,16.142 9.5,16.142 9.239,15.88 9.239,14.737 9.62,14.356 10.636,14.356 12.16,12.832 16.986,12.832 18.002,11.816 21.177,11.816 22.32,12.959 22.32,13.852 v1(22.004,14.168)
SDA: H1.2 R12.1 U2.3 U3.13 | length 36.3
  Top Layer w0.152: v1(16.478,22.357) 17.367,22.357 17.604,22.12 U3.13 ; H1.2 30.599,26.774 30.599,27.655 30.222,28.032 28.825,28.032 28.338,27.545 28.338,22.804 28.952,22.19 35.429,22.19 35.654,22.415 U2.3
  Top Layer w0.254: R12.1@30.603,24.733 30.603,26.762 H1.2
  Bottom Layer w0.152: v1(16.478,22.357) 19.145,25.024 24.86,25.024 25.749,24.135 29.246,24.135 v1(30.609,25.499)
VBUS: D1.2 D5.2 F1.1 Q1.1 R2.1 U4.4 | length 14.4
  Top Layer w0.254: U4.4 22.388,7.076 22.225,7.239 22.225,9.652 22.479,9.906 23.987,9.906 24.351,9.906 24.986,10.541 26.016,10.541 D1.2 26.052,10.505 F1.1@27.932,10.505 ; 23.987,9.922 D5.2 ; Q1.1 F1.1@27.932,10.505 ; F1.1 F1.1@27.932,10.505 ; R2.1 F1.1@27.932,10.505
VGH: C1.1 D4.1 J2.21 | length 13.6
  Top Layer w0.203: v1(10.029,20.15) J2.21
  Top Layer w0.254: v1@13.458,27.639 D4.1 C1.1
  Bottom Layer w0.152: v1(10.029,20.15) 12.05,20.15 13.464,21.564 v1(13.464,27.645)
VGL: C2.2 D2.2 J2.23 | length 19
  Top Layer w0.203: v1(10.029,21.15) J2.23
  Top Layer w0.254: v1(3.812,21.15) 3.812,30.063 4.066,30.317 C2.2 D2.2
  Bottom Layer w0.254: v1(3.812,21.15) v1(10.029,21.15)
VUSB: C28.1 D6.4 | length 1.2
  Top Layer w0.152: C28.1 12.326,10.636 D6.4@13.505,10.636
XTAL_N: C27.1 U3.52 X1.3 | length 5.3
  Top Layer w0.152: U3.52 26.352,19.277 26.595,19.52 X1.3 C27.1
XTAL_P: C26.1 U3.53 X1.1 | length 4.9
  Top Layer w0.152: U3.53 24.491,19.677 24.758,19.944 24.758,20.935 X1.1 25.749,21.926 C26.1
pads on no net: A1.2 D6.1 J1. J1.A8 J1.B8 J2.1 J2.4 J2.6 J2.7 J2.19 U1.4 U2.7 U3.6 U3.7 U3.11 U3.12 U3.15 U3.16 U3.17 U3.18 U3.19 U3.21 U3.22 U3.23 U3.29 U3.31 U3.32 U3.33 U3.34 U3.35 U3.36 U3.40 U3.42 U3.43 U3.44 U3.46 U3.47 U3.48 U3.49 U3.50 U3.55

## Polygon pours and split planes (outlines as drawn)
GND on Layer 1 (GND) (split plane): 36.89,0.51 0.51,0.51 0.51,7.975 0.509,7.987 0.518,8.092 0.545,8.208 0.591,8.319 0.654,8.421 0.731,8.512 0.822,8.589 0.924,8.652 1.035,8.698 1.151,8.725 1.259,8.734 1.272,8.733 1.273,8.733 1.276,8.733 1.45,8.741 1.623,8.767 1.792,8.81 1.957,8.868 2.115,8.943 2.264,9.033 2.405,9.137 2.534,9.254 2.652,9.384 2.756,9.524 2.845,9.674 2.92,9.832 2.979,9.996 3.021,10.166 3.047,10.339 3.055,10.503 3.056,10.511 3.056,21.289 3.055,21.297 3.047,21.461 3.021,21.634 2.979,21.804 2.92,21.968 2.845,22.126 2.756,22.276 2.652,22.416 2.534,22.546 2.405,22.663 2.264,22.767 2.115,22.857 1.957,22.931 1.792,22.99 1.623,23.033 1.45,23.058 1.276,23.067 1.273,23.067 1.272,23.067 1.259,23.066 1.151,23.074 1.035,23.102 0.924,23.148 0.822,23.21 0.731,23.288 0.654,23.379 0.591,23.481 0.545,23.591 0.518,23.708 0.509,23.813 0.51,23.825 0.51,31.29 17.588,31.29 17.588,27.711 21.688,27.711 21.688,18.022 22.297,18.022 22.297,27.711 25.208,27.711 25.208,31.29 36.89,31.29
+3.3V on Layer 2 (PWR) (split plane): 36.89,0.51 0.51,0.51 0.51,7.975 0.509,7.987 0.518,8.092 0.545,8.208 0.591,8.319 0.654,8.421 0.731,8.512 0.822,8.589 0.924,8.652 1.035,8.698 1.151,8.725 1.259,8.734 1.272,8.733 1.273,8.733 1.276,8.733 1.45,8.741 1.623,8.767 1.792,8.81 1.957,8.868 2.115,8.943 2.264,9.033 2.405,9.137 2.534,9.254 2.652,9.384 2.756,9.524 2.845,9.674 2.92,9.832 2.979,9.996 3.021,10.166 3.047,10.339 3.055,10.503 3.056,10.511 3.056,21.289 3.055,21.297 3.047,21.461 3.021,21.634 2.979,21.804 2.92,21.968 2.845,22.126 2.756,22.276 2.652,22.416 2.534,22.546 2.405,22.663 2.264,22.767 2.115,22.857 1.957,22.931 1.792,22.99 1.623,23.033 1.45,23.058 1.276,23.067 1.273,23.067 1.272,23.067 1.259,23.066 1.151,23.074 1.035,23.102 0.924,23.148 0.822,23.21 0.731,23.288 0.654,23.379 0.591,23.481 0.545,23.591 0.518,23.708 0.509,23.813 0.51,23.825 0.51,31.29 17.588,31.29 17.588,27.711 21.688,27.711 21.688,18.026 22.297,18.026 22.297,27.711 25.208,27.711 25.208,31.29 36.89,31.29

## Other copper
Top Layer:
  rectangle net GND: 30.98,11.394 31.691,12.918
  rectangle net GND: 30.98,18.887 31.717,20.411
  pour cut-out: 17.588,31.775 17.588,27.711 25.208,27.711 25.208,31.775
  text "1" at 35.095,15.509 h1.02
Bottom Layer:
  pour cut-out: 17.588,31.775 17.588,27.711 25.208,27.711 25.208,31.775
  text "4" at 35.628,15.509 h1.02
Layer 1 (GND) (plane layer: these items are gaps in the copper):
  pour cut-out: 21.688,31.796 21.688,18.022 22.297,18.022 22.297,31.796
  pour cut-out: 17.588,31.775 17.588,27.711 25.208,27.711 25.208,31.775
  text "2" at 34.968,15.509 h1.02
Layer 2 (PWR) (plane layer: these items are gaps in the copper):
  pour cut-out: 21.688,31.8 21.688,18.026 22.297,18.026 22.297,31.8
  pour cut-out: 17.588,31.775 17.588,27.711 25.208,27.711 25.208,31.775
  text "3" at 34.968,15.509 h1.02

## Silkscreen, mask and mechanical layers (free items; w line width, h text height)
Top Overlay:
  text "REV 1.0" at 1.287,31.017 h1.02 r270
  text "QwiiC" at 27.129,27.447 h0.89 r90
  text "Temp/Hum" at 36.908,21.097 h0.76 r90
  text "CHG" at 22.022,11.735 h0.89
  text "ESP32-S2" at 24.054,2.718 h1.02
  text "IO0" at 8.809,2.477 h0.89
  text "LiPo" at 14.775,1.971 h0.89
  text "E-INK" at 24.054,0.94 h1.02
  text "1.54\"" at 29.896,0.94 h1.02
Mechanical 1:
  the board outline again, w0.254